# Altium PCB 48-17V Buck Converter.PcbDoc
Units mil, origin at the board's own origin, x right, y up, seen from the top; angles counter-clockwise.
Board outline 2755.91 x 1771.65 mil, 4 copper layers (TOP, GNG, GND, BOT), stack 64.961 mil thick; 43 components, 13 nets, 79 pads, 45 vias.
Unrouted connection lines stored in the file: 2.
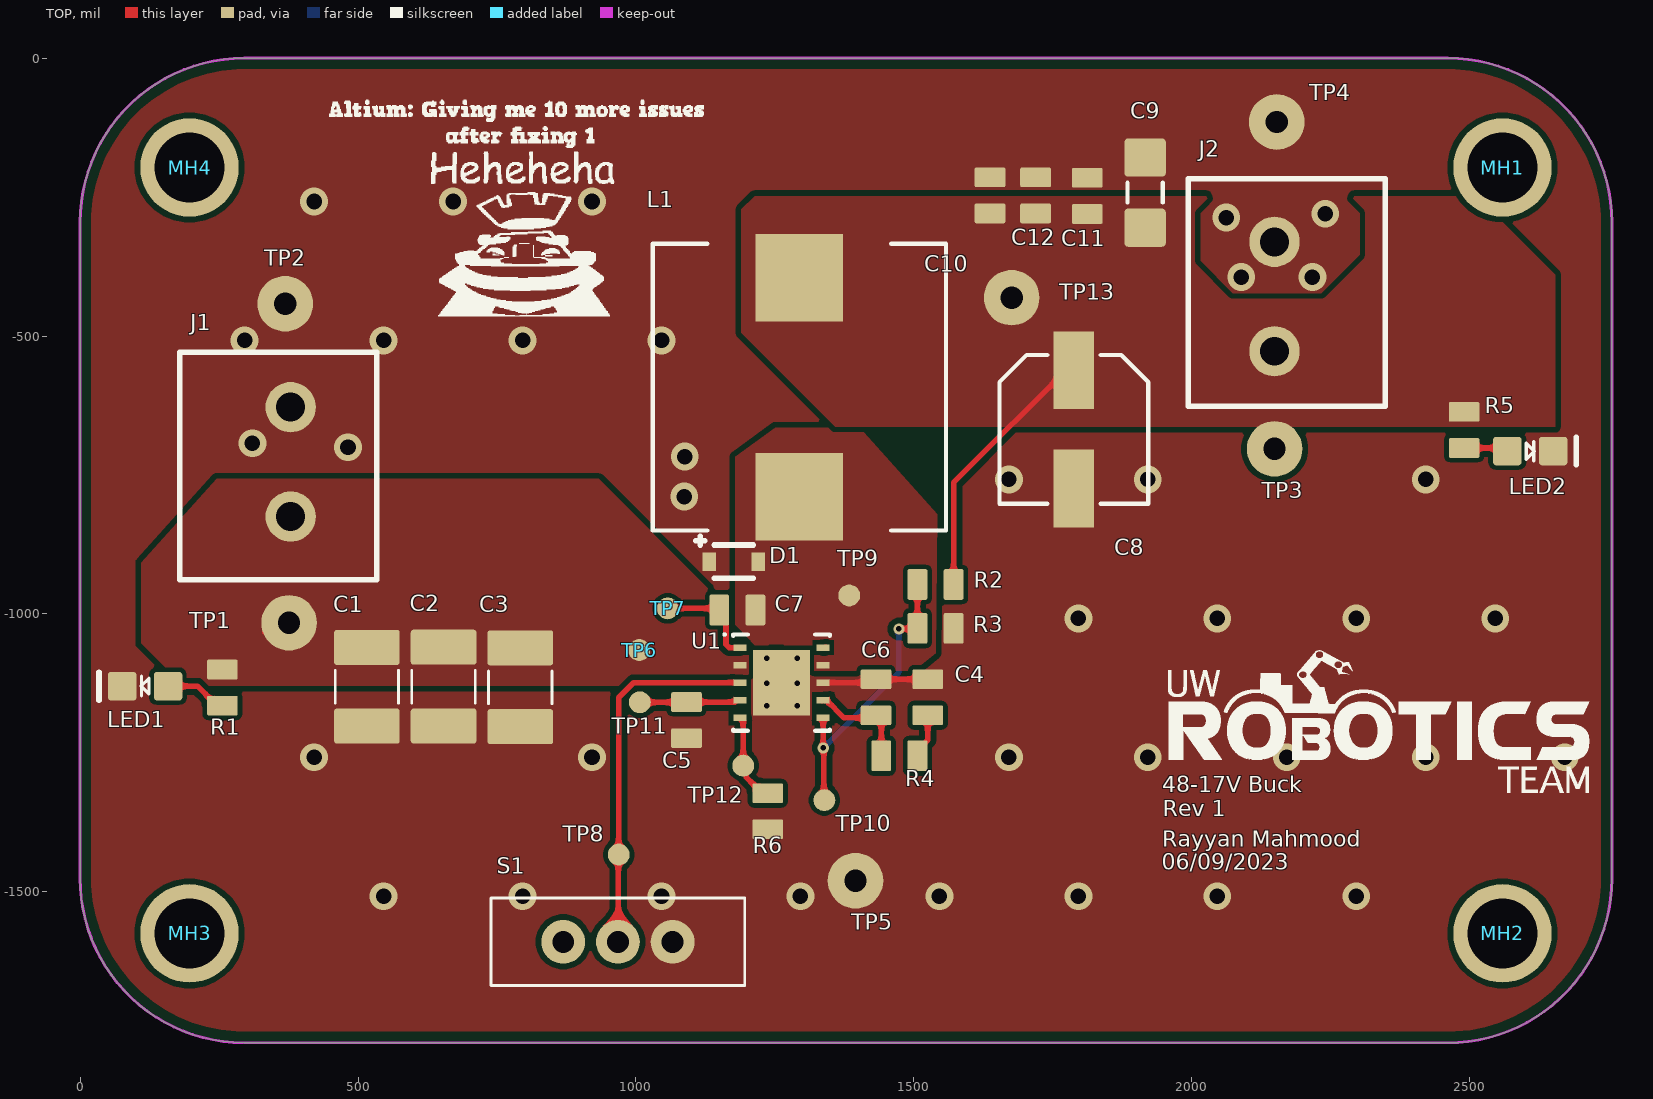
[diagram p0: TOP view]
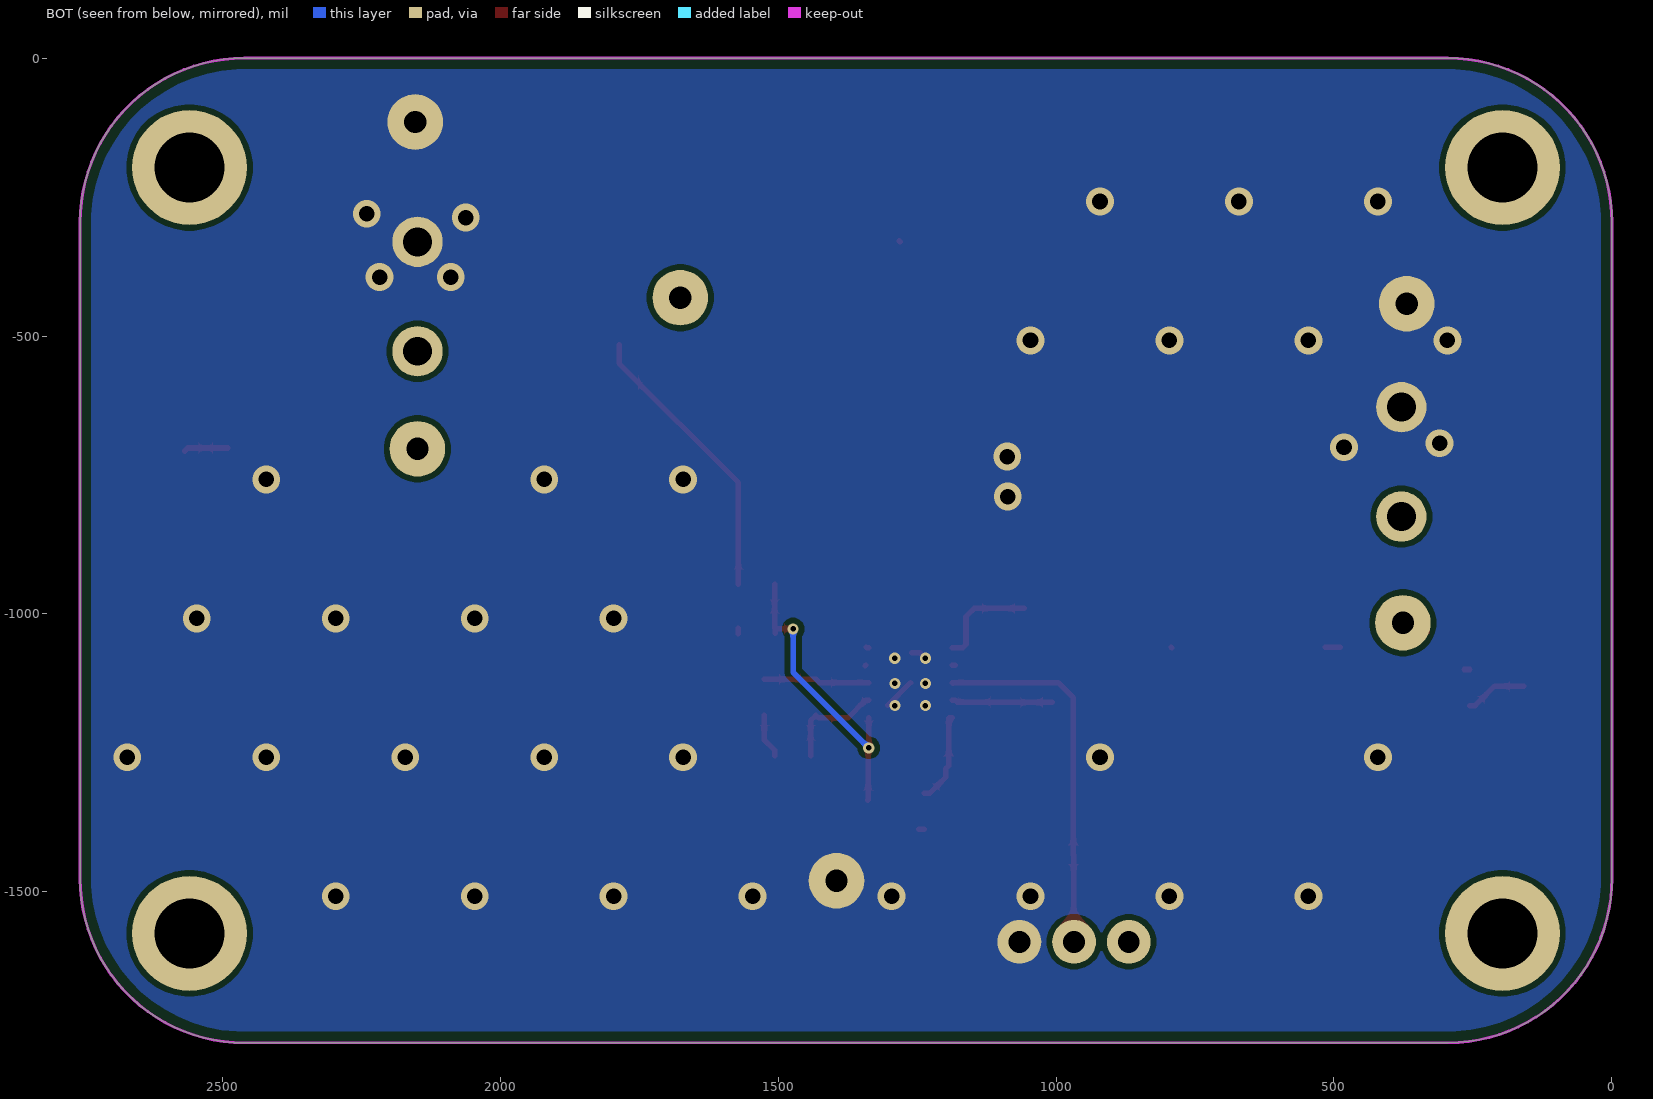
[diagram p1: BOT view, seen from below]
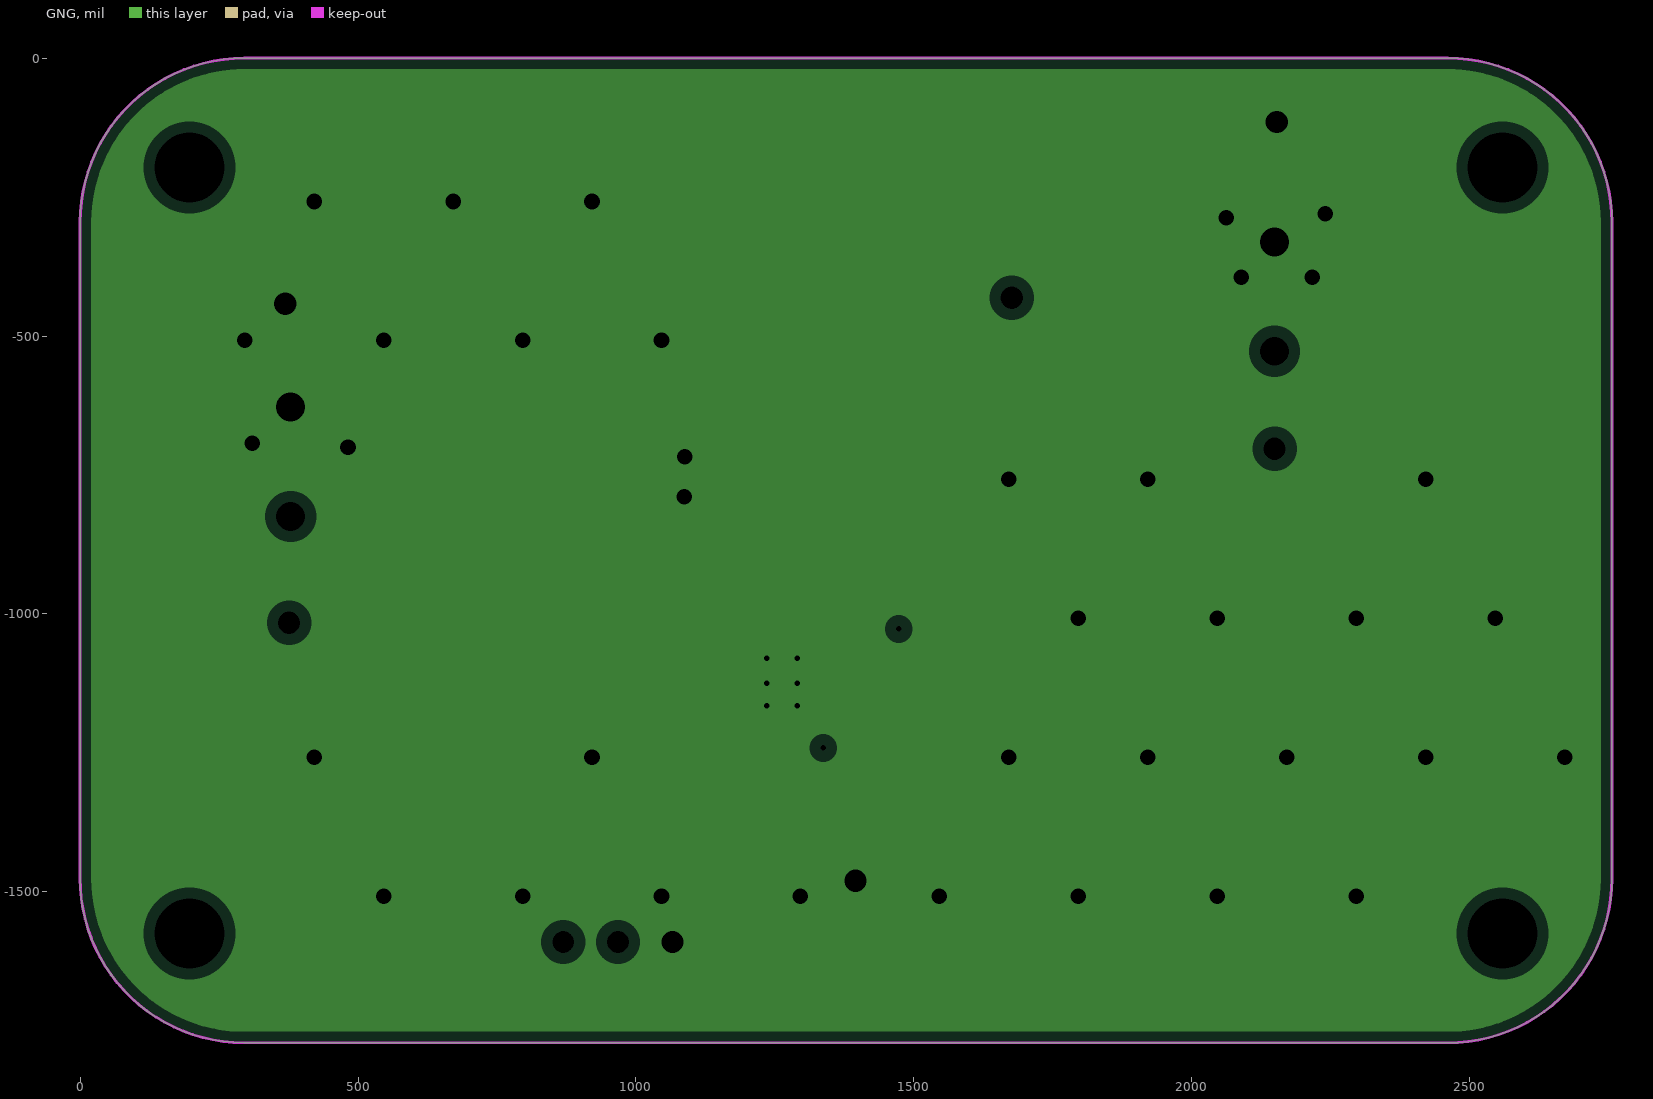
[diagram p2: GNG, clearances drawn from the general rule]
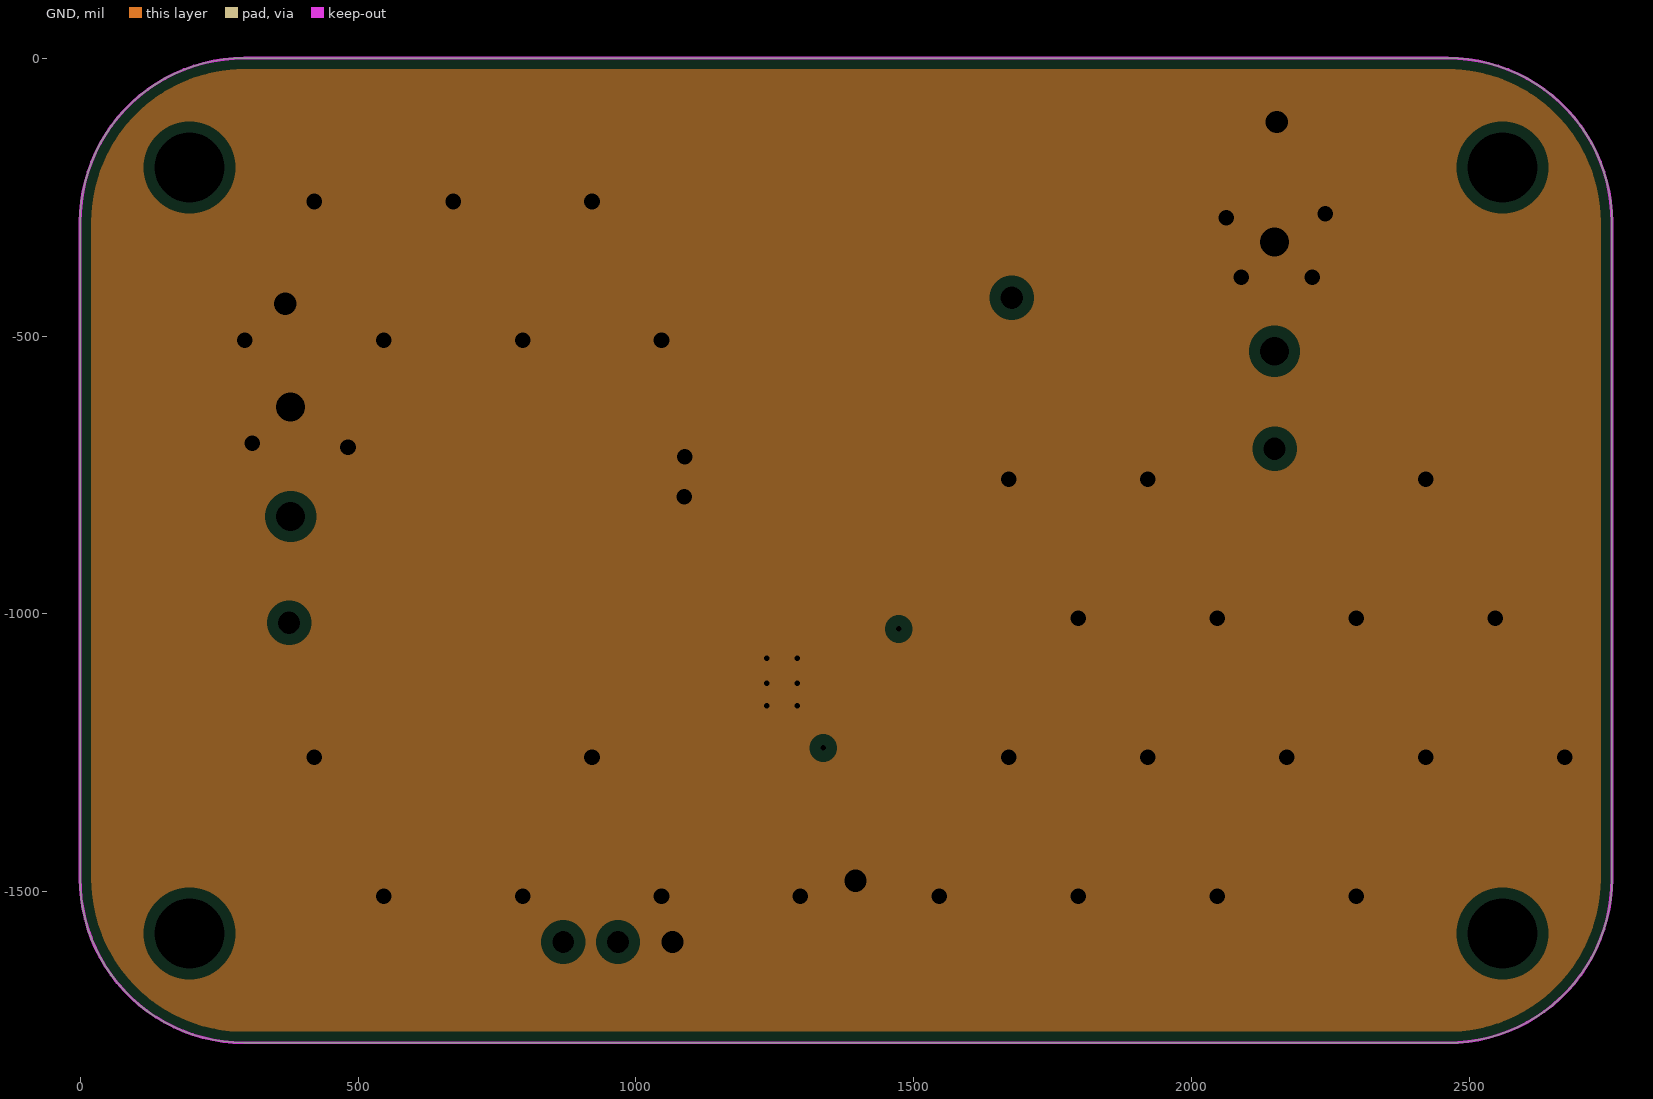
[diagram p3: GND, clearances drawn from the general rule]
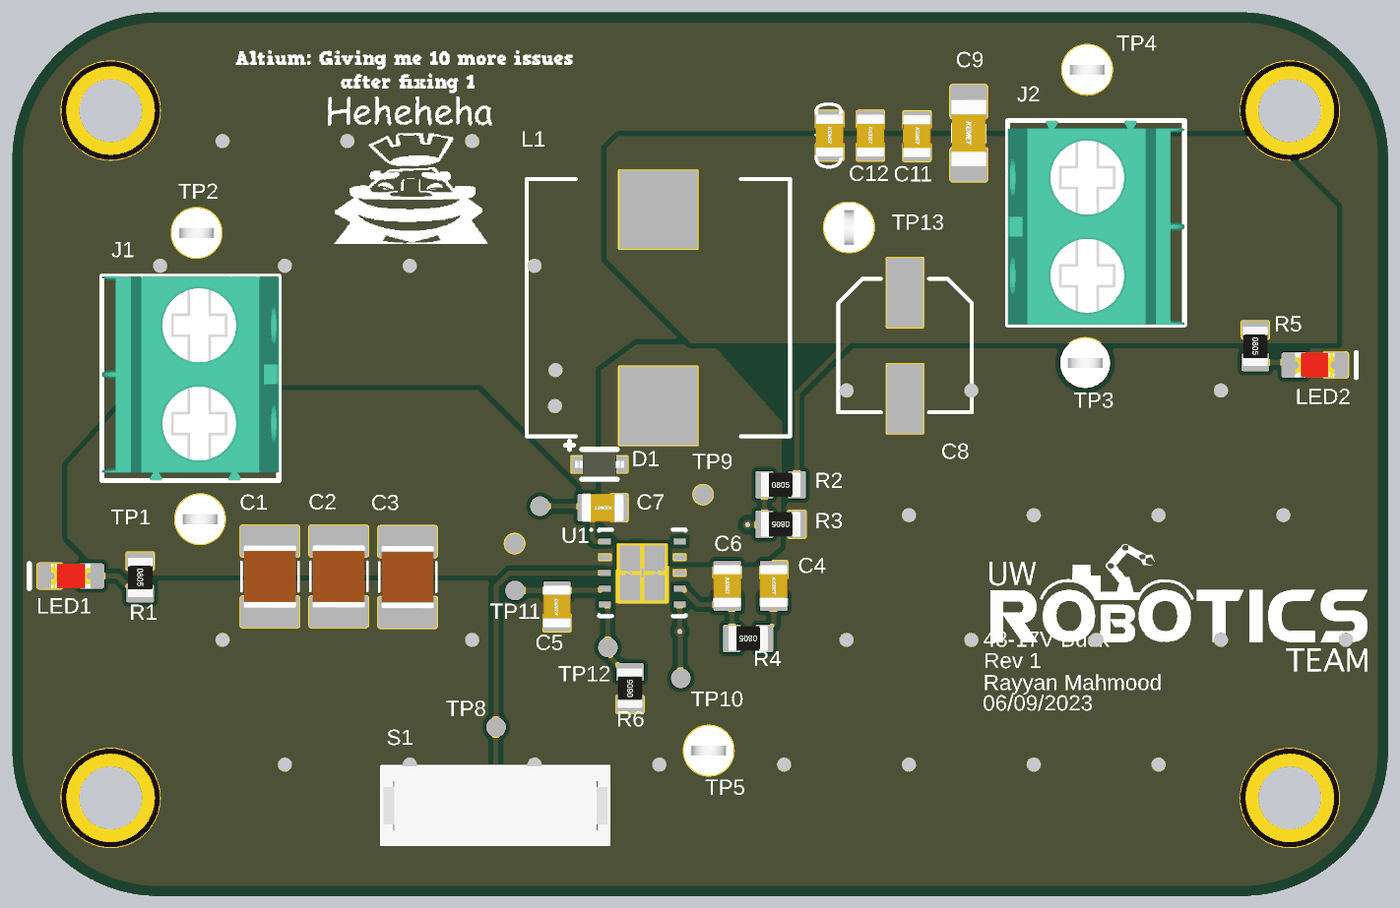
[diagram p4: 3D render of the assembled board from above, using the file's embedded part models]

## Layer stack, top to bottom
Top Solder: solder mask 0.5, Solder Resist, Dk 3.8
TOP: signal copper 2.953
Dielectric 1: prepreg 7.874, 7628, Dk 4.6
GNG: plane copper 0.689, net GND
Core: core 41.929, FR-4, Dk 4.5
GND: plane copper 0.689, net GND
Dielectric 2: prepreg 7.874, 7628, Dk 4.6
BOT: signal copper 2.953
Bottom Solder: solder mask 0.5, Solder Resist, Dk 3.8

## Board outline
0,-1475.54 ccw(c295.28,-1476.38) 294.02,-1771.65 2460.63,-1771.65 ccw(c2460.63,-1476.38) 2755.91,-1476.38 2755.91,-295.28 ccw(c2460.63,-295.28) 2460.63,0 295.28,0 ccw(c295.28,-295.28) 0,-295.28

## Design rules (kind name [scope] priority, off if disabled: settings)
BoardOutlineClearance [All] p1: gap=20 ignorepadtopadclearanceinfootprint=FALSE except(5: Text-OutlineEdge Text-CavityEdge Text-CutoutEdge Text-SplitBarrior Text-SplitContinuation; 25: Track-OutlineEdge Track-CavityEdge Track-CutoutEdge Track-SplitBarrior Track-SplitContinuation)
Clearance "High Voltage Internal" [InNetClass('High_Voltage_Internal')  and OnLayer('Power')] p1: gap=20 ignorepadtopadclearanceinfootprint=TRUE
Clearance "High Voltage External" [InNetClass('High_Voltage')  and OnLayer('Signal')] p2: gap=12 ignorepadtopadclearanceinfootprint=TRUE
Clearance Clearance_1 [All] p3: gap=10 ignorepadtopadclearanceinfootprint=TRUE except(0: Arc-Text Track-Text Text-Hole; 5: Track-Track SMDPad-SMDPad Text-Text; 7: SMDPad-Region; 8: Arc-Arc Arc-Track Arc-SMDPad Arc-Hole Track-SMDPad Track-Region Track-Hole SMDPad-THPad SMDPad-Fill SMDPad-Poly SMDPad-Text SMDPad-Hole THPad-Hole Via-Hole Fill-Hole Poly-Hole Region-Region Region-Hole; 20: THPad-THPad Via-Via)
ComponentClearance [All] p1: gap=10 collisioncheckmode=3 verticalgap=200 showdistances=FALSE
DiffPairsRouting [All] p1: maxlimit=10 minlimit=8 mostfreqgap=10 toplayer_minwidth=10 toplayer_maxwidth=10 toplayer_prefwidth=10 bottomlayer_minwidth=10 bottomlayer_maxwidth=10 bottomlayer_prefwidth=10 maxuncoupledlength=500
Height [All] p1: minheight=0 maxheight=50000 prefheight=500
HoleSize [All] p1: absolutevalues=TRUE maxlimit=200 minlimit=10 maxpercent=80.000 minpercent=20.000
HoleToHoleClearance [All] p1: gap=20 allowstackedmicrovias=TRUE
MinimumAnnularRing [All] p1: minimumring=5
MinimumSolderMaskSliver [All] p1: minsoldermaskwidth=3
PlaneClearance [All] p1: clearance=20
PlaneConnect PlaneConnect_highpwr [(InNet('24V') OR InNet('VBAT'))] p1: planeconnectstyle=Direct reliefexpansion=20 reliefentries=4 reliefconductorwidth=10 reliefairgap=10
PlaneConnect PlaneConnect_GNDCON [(InNet('GND') AND (InComponent('J1') OR InComponent('J2')))] p2: planeconnectstyle=Direct reliefexpansion=20 reliefentries=4 reliefconductorwidth=10 reliefairgap=10
PlaneConnect [All] p3: pad.planeconnectstyle=Relief pad.reliefexpansion=20 pad.reliefentries=4 pad.reliefconductorwidth=10 pad.reliefairgap=10 via.planeconnectstyle=Direct via.reliefexpansion=20 via.reliefentries=4 via.reliefconductorwidth=10 via.reliefairgap=10
PolygonConnect PolygonConnect_Via [IsVia] p1: connectstyle=Direct reliefconductorwidth=10 reliefentries=4 polygonreliefangle="90 Angle" airgapwidth=10
PolygonConnect [All] p2: connectstyle=Direct reliefconductorwidth=10 reliefentries=4 polygonreliefangle="90 Angle" airgapwidth=10
RoutingVias [All] p1: holewidth=12 width=24 viastyle="Through Hole" minholewidth=6 minwidth=12 maxholewidth=24 maxwidth=50
SilkToSilkClearance [All] p1: silktosilkclearance=2
SilkToSolderMaskClearance [IsPad] p1: minsilkscreentomaskgap=0.5 clearancetoexposedcopper=TRUE
SolderMaskExpansion [All] p1: expansion=2 istentingtop=FALSE
Width Width_1 [All] p1: maxlimit=100 minlimit=5 preferedwidth=10 minimp=50.000000 maximp=50.000000 favimp=50.000000
20 further rules are at their usual default settings.

## Components (designator, comment, footprint, x,y, rotation, side; value= is the part's Value field where it differs from the comment)
C1 "CAP_2.2uF_100V_1210_1" CAPC3225X270N 516,-1131 r90 top value=2.2μF
C2 "CAP_2.2uF_100V_1210_1" CAPC3225X270N 653.92,-1130.78 r90 top value=2.2μF
C3 "CAP_2.2uF_100V_1210_1" CAPC3225X270N 792,-1132 r90 top value=2.2μF
C4 "CAP_680pF_50V_0805" CAP0805 1525,-1150 r270 top value=680pF
C5 "CAP_2.7nF_50V_0805" CAP0805 1091,-1191 r90 top value=2.7nF
C6 "CAP_6.8pF_100V_0805" CAP0805 1432,-1150 r270 top value=6.8pF
C7 "CAP_100nF_50V_0805" CAP0805 1182.52,-993 r180 top value=100nF
C8 "CAP_47uF_25V_ALUM" CAP_47uF_25V_ALUM 1788,-668 r270 top value=47uF
C9 "CAP_NU_1206" CAP1206 1916,-242 r270 top value=NU
C10 "CAP_NU_0805" CAP0805 1637,-247 r270 top value=NU
C11 "CAP_NU_0805" CAP0805 1812,-248 r270 top value=NU
C12 "CAP_NU_0805" CAP0805 1719,-247 r270 top value=NU
D1 "DIO_SCHOTTKY_30V_800mA" SOD-323_UNIDIR 1176,-906 r0 top
J1 "CON_2POS_SCREW_TERM" 1935161 378.87,-726.4 r270 top
J2 "CON_2POS_SCREW_TERM" 1935161 2148.91,-429 r90 top
L1 "IND_22uH_6.3A" IND_22uH_6.3A 1294,-592 r90 top
LED1 "LED_RED" LED_0805_RED 117,-1130 r180 top
LED2 "LED_RED" LED_0805_RED 2609,-707 r0 top
MH1 "MOUNTING_HOLE_M3_GIMBAL_REV2" MOUNTING_HOLE_3mm_GIMBAL_REV2#1 2524.48,-165.52 r0 top
MH2 "MOUNTING_HOLE_M3_GIMBAL_REV2" MOUNTING_HOLE_3mm_GIMBAL_REV2#2 2579.91,-1561.65 r0 top
MH3 "MOUNTING_HOLE_M3_GIMBAL_REV2" MOUNTING_HOLE_3mm_GIMBAL_REV2#3 259.52,-1529.49 r0 top
MH4 "MOUNTING_HOLE_M3_GIMBAL_REV2" MOUNTING_HOLE_3mm_GIMBAL_REV2#4 137.8,-149.65 r0 top
R1 "RES_4.7kΩ_0805_5%" RES0805 256,-1132.52 r270 top value=4.7kΩ
R2 "RES_243kΩ_0805_1%_1" RES0805 1539,-947 r0 top value=243kΩ
R3 "RES_12kΩ_0805_1%" RES0805 1539,-1026 r180 top value=12kΩ
R4 "RES_68.1kΩ_0805_1%" RES0805 1474,-1255 r180 top value=68.1kΩ
R5 "RES_1.6kΩ_0805_0.1%" RES0805 2490,-669 r270 top value=1.6kΩ
R6 "RES_205kΩ_0805_1%" RES0805 1237,-1355 r90 top value=205kΩ
S1 "SW_SLIDE_TOGGLE" SW_SLIDE_TOGGLE 967.57,-1590 r180 top
TP1 "TESTPOINT_LOOP" TESTPOINT_LOOP 376,-1016 r0 top
TP2 "TESTPOINT_LOOP" TESTPOINT_LOOP 369,-442 r0 top
TP3 "TESTPOINT_LOOP" TESTPOINT_LOOP 2149,-703 r0 top
TP4 "TESTPOINT_LOOP" TESTPOINT_LOOP 2153,-115 r0 top
TP5 "TESTPOINT_LOOP" TESTPOINT_LOOP 1395,-1480 r0 top
TP6 "TESTPOINT_1MM_CIRCLE" TESTPOINT_CIRCLE_1MM 1006,-1065 r90 top
TP7 "TESTPOINT_1MM_CIRCLE" TESTPOINT_CIRCLE_1MM 1057,-990 r90 top
TP8 "TESTPOINT_1MM_CIRCLE" TESTPOINT_CIRCLE_1MM 969.01,-1433 r90 top
TP9 "TESTPOINT_1MM_CIRCLE" TESTPOINT_CIRCLE_1MM 1383.71,-966.72 r90 top
TP10 "TESTPOINT_1MM_CIRCLE" TESTPOINT_CIRCLE_1MM 1339,-1335 r90 top
TP11 "TESTPOINT_1MM_CIRCLE" TESTPOINT_CIRCLE_1MM 1007,-1159 r90 top
TP12 "TESTPOINT_1MM_CIRCLE" TESTPOINT_CIRCLE_1MM 1193,-1273 r90 top
TP13 "TESTPOINT_LOOP" TESTPOINT_LOOP 1676,-431 r90 top
U1 "TPS54561" BUCK_TPS54561DPRR 1261.91,-1123.65 r0 top

## Footprints (in the part's own frame and the unit in brackets; to place one, negate y for a bottom-side part, rotate by r counter-clockwise, add the part's x,y. Pads: shape width x height; smd on the part's side, far side on the other; paste and mask are expansions set on the pad)
1935161 [mm] "TERM BLK 2POS SIDE ENTRY 5MM PCB"
  round 2.3 hole 1.325: 1(-2.5,0) 2(2.5,0)
  silkscreen extent -5.01,-5.06 5.39,3.94, body extent -5.01,-5.06 5.39,3.94, height 11.41
BUCK_TPS54561DPRR [mm] "Buck Switching Regulator IC Positive Adjustable 0.8V 1 Output 5A 10-WDFN Exposed Pad"
  rect 0.6x0.3 smd: 1(-1.9,1.6) 2(-1.9,0.8) 3(-1.9,0) 4(-1.9,-0.8) 5(-1.9,-1.6) 6(1.9,-1.6) 7(1.9,-0.8) 8(1.9,0) 9(1.9,0.8)
  rect 0.6x0.3 smd mask+0.051: 10(1.9,1.6)
  rect 2.6x3 smd paste-1.245: 11(0,0)
  silkscreen extent -2.65,-2.2 2.2,2.25, body extent -2.05,-2.05 2.05,2.05, height 0.8
CAP0805 [mm] "Chip Capacitor, Body 2.0x1.2mm, Height 0.45mm, IPC Medium Density"
  rrect15% 0.9x1.4 smd: 1(-0.825,0) 2(0.825,0)
  body extent -1.1,-0.73 1.1,0.73, height 1.39
CAP1206 [mm] "Chip Capacitor, Body 3.2x1.6mm, Height 0.55mm, IPC Medium Density"
  rrect20% 1.75x1.9 smd: 1(-1.6,0) 2(1.6,0)
  silkscreen extent -0.45,-0.8 0.45,0.8, body extent -1.7,-0.9 1.7,0.9, height 0.88
CAP_47uF_25V_ALUM [mm] "Aluminum Electrolytic Capacitor, Body 6.60x6.60x6.00mm, IPC Low Density"
  rect 3.55x1.85 smd: 1(-2.7,0) 2(2.7,0)
  silkscreen extent -3.4,-3.4 3.4,3.4, body extent -3.4,-3.4 3.4,3.4, height 6
CAPC3225X270N [mm]
  rrect15% 1.6x3 smd: 1(-1.8,0) 2(1.8,0)
  silkscreen extent -0.75,-1.45 0.75,1.45, body extent -1.6,-1.35 1.6,1.35, height 2.55
IND_22uH_6.3A [mm] "Precision Wire Wound Inductor, 2-Leads, Body 13.10x13.40mm, IPC Medium Density"
  rect 4x4 smd: 1(-5,0) 2(5,0)
  silkscreen extent -6.55,-6.7 6.55,6.7, body extent -6.55,-6.7 6.55,6.7, height 3.7
LED_0805_RED [mm] "SMD, 2-Leads, Body 2x1.25mm"
  rrect20% 1.3x1.3 smd: 1(-1.05,0) 2(1.05,0)
  silkscreen extent -0.18,-0.63 2.11,0.64, body extent -1,-0.62 1,0.63, height 1.12
MOUNTING_HOLE_3mm_GIMBAL_REV2#1 [mm] "3mm Hole"
  round 4.5 / inner round 4.5 / far side round 5.25 hole 3.2 mask+0.3: 0(0.878,-0.796)
MOUNTING_HOLE_3mm_GIMBAL_REV2#2 [mm] "3mm Hole"
  round 4.5 / inner round 4.5 / far side round 5.25 hole 3.2 mask+0.3: 0(-0.53,-0.334)
MOUNTING_HOLE_3mm_GIMBAL_REV2#3 [mm] "3mm Hole"
  round 4.5 / inner round 4.5 / far side round 5.25 hole 3.2 mask+0.3: 0(-1.592,-1.151)
MOUNTING_HOLE_3mm_GIMBAL_REV2#4 [mm] "3mm Hole"
  round 4.5 / inner round 4.5 / far side round 5.25 hole 3.2 mask+0.3: 0(1.5,-1.199)
RES0805 [mm] "Chip Resistor, 2-Leads, Body 2.00x1.25mm, IPC High Density"
  rrect15% 0.9x1.4 smd: 1(-0.825,0) 2(0.825,0)
  body extent -1,-0.62 1,0.63, height 0.61
SOD-323_UNIDIR [mm]
  rect 0.63x0.83 smd: 1(-1.115,0) 2(1.115,0)
  silkscreen extent -1.73,-0.76 0.9,1.17, body extent -1.24,-0.62 1.24,0.62, height 1.1
SW_SLIDE_TOGGLE [mm]
  round 2 hole 1: 1(-2.5,0) 2(0,0) 3(2.5,0)
  silkscreen extent -5.8,-2 5.8,2, body extent -5.8,-2 5.8,2, height 7
TESTPOINT_CIRCLE_1MM [mm]
  round 1 smd: 1(0,0)
TESTPOINT_LOOP [mm]
  round 2.54 hole 1.02: 1(0,0)
  body extent -1.27,-1.27 1.27,1.27, height 4.57

## Part data
C1 C2 C3: "CAP CER 2.2UF 100V X7R 1210", Manufacturer 1="TDK Corporation", Manufacturer Part Number 1=C3225X7R2A225K230AB, Package/Footprint=1210, Supplier Part Number 1=445-4497-1-ND, Voltage Rating=100V, Mounting Type=SMD, Supplier 1=Digi-Key
C4: "CAP CER 680PF 100V C0G/NP0 0805", Manufacturer 1="KYOCERA AVX", Manufacturer Part Number 1=08051A681JAT2A, Package/Footprint=0805, Supplier Part Number 1=478-1289-1-ND, Voltage Rating=100V, Supplier 1=Digi-Key
C5: "CAP CER 2700PF 50V C0G 0805", Manufacturer 1="TDK Corporation", Manufacturer Part Number 1=C2012C0G1H272J060AA, Package/Footprint=0805, Supplier Part Number 1=445-7508-1-ND, Voltage Rating=50V, Supplier 1=Digi-Key
C6: "CAP CER 6.8PF 100V C0G/NP0 0805", Manufacturer 1="KYOCERA AVX", Manufacturer Part Number 1=08051A6R8CAT2A, Package/Footprint=0805, Supplier Part Number 1=478-5025-1-ND, Voltage Rating=100V, Supplier 1=Digi-Key
C7: "CAP CER 0.1UF 50V X7R 0805", Manufacturer 1="Samsung Electro-Mechanics", Manufacturer Part Number 1=CL21B104KBCNNNC, Package/Footprint=0805, Supplier Part Number 1=1276-1003-1-ND, Voltage Rating=50V, Supplier 1=Digi-Key
C8: "CAP ALUM POLY 47UF 20% 25V SMD", Manufacturer 1="Panasonic Electronic Components", Manufacturer Part Number 1=25SVPF47M, Supplier Part Number 1=P16513CT-ND, Voltage=25V, Mounting Type=SMD, Supplier 1=DigiKey
C9: "PLACEHOLDER CAPACITOR", Package=1206, Mounting Type="Surface Mount"
C10 C11 C12: "PLACEHOLDER CAPACITOR", Package=0805, Mounting Type=SMD
D1: library part DIO_SCHOTTKY_60V_5A, "DIODE SCHOTTKY 60V 5A SMC", Manufacturer 1="Diodes Incorporated", Manufacturer Part Number 1=B560C-13-F, Supplier Part Number 1=B560C-FDICT-ND, Io=5A, Mounting Type=SMD, Supplier 1=Digi-Key, Vf (Max)=700mV, Vr (Max)=60V
J1 J2: "TERM BLK 2POS SIDE ENTRY 5MM", Manufacturer 1="Phoenix Contact", Manufacturer Part Number 1=1935161, Package/Footprint=SMD, Supplier Part Number 1=277-1667-ND, Mounting Type=TH, Supplier 1=Digi-Key
L1: "FIXED IND 22UH 6.3A 25.7MOHM SMD", Current Rating=6.3A, DC Resistance (DCR)=22.27mR, Inductance=22μH, Inductance Tolerance=20%, Manufacturer 1="Eaton - Electronics Division", Manufacturer Part Number 1=HC9-220-R, Saturation Current=11A, Supplier Part Number 1=513-1349-1-ND, Mounting Type=SMD, Supplier 1=Digi-Key
LED1 LED2: "LED RED DIFFUSED 0805 SMD", Forward Voltage Drop=2V, Manufacturer 1=OSRAM, Manufacturer Part Number 1="LS R976-NR-1", Package/Footprint=0805, Supplier Part Number 1=475-1278-1-ND, Mounting Type=SMD, Supplier 1=Digi-Key
MH1 MH2 MH3 MH4: "MOUNTING_HOLE_M3 Gimbal Rev2"
R1: "RES 4.7K OHM 5% 1/8W 0805", LCSC Part #=C17673, Manufacturer 1=Yageo, Manufacturer Part Number 1=RC0805JR-074K7L, Package=0805, Supplier Part Number 1=311-4.7KARCT-ND, Mounting Type=SMD, Supplier 1=Digi-Key
R2: "RES 243K OHM 1% 1/8W 0805", Manufacturer 1=YAGEO, Manufacturer Part Number 1=RC0805FR-07243KL, Package/Footprint=0805, Supplier Part Number 1=311-243KCRCT-ND, Mounting Type=SMD, Supplier 1=Digi-Key
R3: "RES 12K OHM 1% 1/8W 0805", Manufacturer 1=YAGEO, Manufacturer Part Number 1=RC0805FR-0712KL, Package/Footprint=0805, Supplier Part Number 1=311-12.0KCRCT-ND, Mounting Type=SMD, Supplier 1=Digi-Key
R4: "RES 68.1K OHM 1% 1/8W 0805", Manufacturer 1=YAGEO, Manufacturer Part Number 1=RC0805FR-0768K1L, Package/Footprint=0805, Supplier Part Number 1=311-68.1KCRCT-ND, Mounting Type=SMD, Supplier 1=Digi-Key
R5: "RES 1.6K OHM 0.1% 1/4W 0805", Manufacturer 1=Panasonic, Manufacturer Part Number 1=ERJ-PB6B1601V, Supplier Part Number 1=P20615CT-ND, Tolerance=0.1%, Mounting Type=SMD, Supplier 1=Digi-Key
R6: "RES 205K OHM 1% 1/8W 0805", Manufacturer 1=YAGEO, Manufacturer Part Number 1=RC0805FR-07205KL, Package/Footprint=0805, Supplier Part Number 1=311-205KCRCT-ND, Mounting Type=SMD, Supplier 1=Digi-Key
S1: "SWITCH SLIDE SPDT 200MA 30V", Manufacturer 1=E-Switch, Manufacturer Part Number 1=100SP1T1B4M2QE, Package/Footprint=TH, Supplier Part Number 1=EG1903-ND, Voltage Rating (DC)=30V, Mounting Type=TH, Supplier 1=Digi-Key, Throw Configuration=SPDT
TP1 TP2 TP3 TP4 TP5 TP13: "TESTPOINT THRUHOLE", Manufacturer 1="Keystone Electronics", Manufacturer Part Number 1=5002, Package/Footprint=TH, Supplier Part Number 1=36-5002-ND, Mounting Type=TH, Supplier 1=Digi-Key
TP6 TP7 TP8 TP9 TP10 TP11 TP12: "TESTPOINT 1MM CIRCLE"
U1: "Buck Switching Regulator IC Positive Adjustable 0.8V 1 Output 5A 10-WDFN Exposed Pad", Manufacturer 1="Texas Instruments", Manufacturer Part Number 1=TPS54561DPRR, Package/Footprint="10-WDFN Exposed Pad", Supplier Part Number 1=296-40803-1-ND, Mounting Type=SMD, Supplier 1=Digi-Key

## Via types
v1: diameter 50, hole 28, TOP to BOT, tented both sides, 37 vias
v2: diameter 20, hole 10, TOP to BOT, tented both sides, 8 vias

## Nets (pads, with @x,y where several pads share a name; then routed paths per layer and width w, separated by ;. In a path a pad name is that pad's centre, name@x,y a point inside that pad or via, vN(x,y) a via of type N, cw(c..) or ccw(c..) an arc to the next point about the centre after c; other vN are vias at no path point)
17V: C8.1 C9.2 C10.2 C11.2 C12.2 J2.1 L1.2 R2.2 R5.1 TP3.1 TP13.1 | length 521.8
  TOP w10: L1.2@1280.83,-330.04 L1.2@1281.91,-328.97 ; R2.2 1571.48,-763.73 1786.11,-549.1 C8.1@1786.11,-515.64
GND: C1.1 C2.1 C3.1 C4.1 C5.1 C6.1 C8.2 C9.1 C10.1 C11.1 C12.1 D1.1 J1.1 J2.2 LED1.2 LED2.2 R3.1 R6.1 S1.1 TP2.1 TP4.1 TP5.1 U1.8 U1.11 | length 325.5
  TOP w10: v2(1235.25,-1079.75) 1245.23,-1069.77 U1.11@1259.84,-1069.77 ; R6.1 R6.1@1246.84,-1387.48 ; U1.11 U1.11@1302.59,-1164.33 ; U1.8 1425.87,-1123.65 C6.1 C4.1 ; R3.1@1571.48,-1035.84 R3.1 ; J2.2 J2.2@2150.91,-328.57 ; TP4.1 TP4.1@2168.05,-99.95 ; J2.2@2159.91,-330.22 J2.2@2163.19,-326.93
  other v1: 546,-1508 796,-1508 1046,-1508 1296,-1508 1546,-1508 1796,-1508 2046,-1508 2296,-1508 421,-1258 921,-1258 1671,-1258 1921,-1258 2171,-1258 2421,-1258 2671,-1258 1796,-1008 2046,-1008 2296,-1008 2546,-1008 1087,-789 1671,-758 1921,-758 2421,-758 1088,-717 482,-700 310,-693 296,-508 546,-508 796,-508 1046,-508 2089,-394 2217,-394 2062,-287 2240,-280 421,-258 671,-258 921,-258
  other v2: 1235,-1165 1290,-1165 1235,-1125 1290,-1125 1290.25,-1079.75
NetC4_2: C4.2 R4.1 | length 80.2
  TOP w10: R4.1 1506.48,-1245.16 1525,-1226.64 C4.2
NetC5_2: C5.2 TP11.1 U1.4 | length 181.7
  TOP w10: TP11.1 1090.52,-1159 C5.2 1177.82,-1158.52 1181.2,-1155.14 U1.4
NetC6_2: C6.2 R4.2 U1.7 | length 187.8
  TOP w10: U1.7 1342.61,-1155.14 1374.47,-1187 1427.48,-1187 C6.2 1441.52,-1192 R4.2 ; U1.7@1342.57,-1155.32 U1.7@1343.3,-1156.05
NetC7_1: C7.1 D1.2 L1.1 TP9.1 U1.9 | length 1.5
  TOP w10: U1.9@1342.57,-1092.33 1342.8,-1092.33 1343.52,-1093.06 U1.9@1343.52,-1093.28
NetC7_2: C7.2 TP7.1 U1.1 | length 188.6
  TOP w10: TP7.1 1147.04,-990 C7.2 1162.01,-1004.97 1162.01,-1054.8 1167.87,-1060.65 U1.1
NetLED1_1: LED1.1 R1.2 | length 112.2
  TOP w10: LED1.1 211.16,-1130 246.16,-1165 R1.2
NetLED2_1: LED2.1 R5.2 | length 79.9
  TOP w10: R5.2 2490.05,-701.53 2562.19,-701.53 LED2.1
NetR2_1: R2.1 R3.2 TP10.1 U1.6 | length 540.4
  TOP w10: U1.6 1336.85,-1186.78 1336.85,-1240.85 v2(1337,-1241) 1338,-1242 1338,-1334 TP10.1 ; v2(1473,-1027) R3.2@1505.52,-1027 ; R3.2@1505.52,-1034.84 R3.2@1505.52,-1027 ; R2.1 R3.2 R3.2@1505.52,-1027
  BOT w10: v2(1337,-1241) 1473,-1105 v2(1473,-1027)
NetR6_2: R6.2 TP12.1 U1.5 | length 165.2
  TOP w10: U1.5 1192.09,-1186.64 1193,-1187.54 TP12.1 1198.62,-1278.62 1198.62,-1293.98 1227.16,-1322.52 R6.2
NetS1_2: S1.2 TP8.1 U1.3 | length 669.9
  TOP w10: S1.2 968.29,-1589.29 968.29,-1433.71 TP8.1 969,-1150.78 996.13,-1123.65 1185.29,-1123.65 1186.2,-1124.55 U1.3
VBAT: C1.2 C2.2 C3.2 J1.2 R1.1 TP1.1 TP6.1 U1.2 | length 105.2
  TOP w10: R1.1 R1.1@265.84,-1100.04 ; TP1.1@332.66,-1033.22 358.78,-1033.22 TP1.1 TP1.1@377.43,-1014.57 ; J1.2@377.43,-826.26 J1.2 ; C1.2@488.44,-1060.13 C1.2 ; C3.2 C3.2@793,-1060.13 ; U1.2@1181.16,-1092.33 U1.2@1187.06,-1092.33 ; U1.2@1181.2,-1092.15 U1.2
pads on no net: MH1.0 MH2.0 MH3.0 MH4.0 S1.3 U1.10
copper on no net: | length 5
  TOP w10: 1336.71,-1060.65 1340.45,-1060.65 1341.35,-1059.75

## Polygon pours and split planes (outlines as drawn)
NetC7_1 on TOP "NETC7_1_L01_P010" (solid, remove dead copper, pour order 10): 1179,-717.43 1250.74,-665 1402,-665 1542,-821 1539,-1071.14 1500.88,-1102 1255.91,-1102 1179,-1019.1
GND on TOP "GND_L01_P012" (solid, remove dead copper, pour order 12): -364.46,84.17 2970.87,84.17 2970.87,-2065.83 -379.13,-2065.83
VBAT on TOP "VBAT_L01_P008" (solid, remove dead copper, pour order 8): 110,-907.69 110,-1053 186,-1129 1182,-1129 1210.4,-1100.6 1210.4,-1034.4 933,-757 245.74,-757
17V on TOP "17V_L01_P009" (solid, remove dead copper, pour order 9): 1189.7,-272.36 1213.94,-248.12 2512.46,-248.12 2653.7,-389.36 2653.7,-663.36 1358.7,-663.36 1189.7,-494.36
GND on TOP "GND_L01_P007" (solid, pour order 7): 2016,-279 2016,-365 2074,-423 2233,-423 2302,-354 2302,-279 2270,-247 2048,-247
GND on BOT "GND_L04_P011" (solid, remove dead copper, pour order 11): 0,-1475.54 ccw(c295.28,-1476.38) 294.02,-1771.65 2460.63,-1771.65 ccw(c2460.63,-1476.38) 2755.91,-1476.38 2755.91,-295.28 ccw(c2460.63,-295.28) 2460.63,0 295.28,0 ccw(c295.28,-295.28) 0,-295.28
GND on GND (split plane): 295.28,-20.1 2460.63,-20.1 2461.36,-20.02 2475.04,-20.38 2489.4,-21.51 2503.69,-23.39 2517.86,-26.02 2531.87,-29.39 2545.69,-33.48 2559.28,-38.29 2572.59,-43.8 2585.6,-50.01 2598.26,-56.89 2610.55,-64.41 2622.43,-72.58 2633.86,-81.35 2644.82,-90.71 2655.27,-100.63 2665.2,-111.08 2674.55,-122.04 2683.33,-133.48 2691.49,-145.35 2699.02,-157.64 2705.9,-170.31 2712.1,-183.31 2717.62,-196.63 2722.43,-210.21 2726.52,-224.03 2729.88,-238.04 2732.51,-252.21 2734.39,-266.5 2735.52,-280.87 2735.88,-294.55 2735.81,-295.28 2735.81,-1476.38 2735.88,-1477.11 2735.52,-1490.78 2734.39,-1505.15 2732.51,-1519.44 2729.88,-1533.61 2726.52,-1547.62 2722.43,-1561.44 2717.62,-1575.02 2712.1,-1588.34 2705.9,-1601.35 2699.02,-1614.01 2691.49,-1626.3 2683.33,-1638.17 2674.55,-1649.61 2665.2,-1660.57 2655.28,-1671.02 2644.82,-1680.94 2633.86,-1690.3 2622.43,-1699.07 2610.55,-1707.24 2598.26,-1714.77 2585.6,-1721.64 2572.59,-1727.85 2559.28,-1733.36 2545.69,-1738.17 2531.88,-1742.27 2517.86,-1745.63 2503.69,-1748.26 2489.4,-1750.14 2475.04,-1751.27 2461.36,-1751.63 2460.63,-1751.55 294.02,-1751.55 293.53,-1751.6 280.87,-1751.27 266.5,-1750.14 252.21,-1748.26 238.04,-1745.63 224.03,-1742.27 210.21,-1738.18 196.63,-1733.36 183.31,-1727.85 170.31,-1721.65 157.64,-1714.77 145.35,-1707.24 133.48,-1699.08 122.04,-1690.3 111.08,-1680.94 100.63,-1671.02 90.71,-1660.57 81.35,-1649.61 72.58,-1638.18 64.41,-1626.3 56.88,-1614.01 50.01,-1601.35 43.8,-1588.34 38.29,-1575.03 33.48,-1561.44 29.39,-1547.62 26.02,-1533.61 23.39,-1519.44 21.51,-1505.15 20.38,-1490.78 20.01,-1476.46 20.1,-1475.54 20.1,-295.28 20.02,-294.55 20.38,-280.87 21.51,-266.5 23.39,-252.21 26.02,-238.04 29.39,-224.03 33.48,-210.21 38.29,-196.63 43.8,-183.31 50.01,-170.31 56.89,-157.64 64.41,-145.35 72.58,-133.48 81.35,-122.04 90.71,-111.08 100.63,-100.63 111.08,-90.71 122.04,-81.35 133.48,-72.58 145.35,-64.41 157.64,-56.89 170.31,-50.01 183.31,-43.8 196.63,-38.29 210.21,-33.48 224.03,-29.39 238.04,-26.02 252.21,-23.39 266.5,-21.51 280.87,-20.38 294.55,-20.02
GND on GNG (split plane): 295.28,-20.1 2460.63,-20.1 2461.36,-20.02 2475.04,-20.38 2489.4,-21.51 2503.69,-23.39 2517.86,-26.02 2531.87,-29.39 2545.69,-33.48 2559.28,-38.29 2572.59,-43.8 2585.6,-50.01 2598.26,-56.89 2610.55,-64.41 2622.43,-72.58 2633.86,-81.35 2644.82,-90.71 2655.27,-100.63 2665.2,-111.08 2674.55,-122.04 2683.33,-133.48 2691.49,-145.35 2699.02,-157.64 2705.9,-170.31 2712.1,-183.31 2717.62,-196.63 2722.43,-210.21 2726.52,-224.03 2729.88,-238.04 2732.51,-252.21 2734.39,-266.5 2735.52,-280.87 2735.88,-294.55 2735.81,-295.28 2735.81,-1476.38 2735.88,-1477.11 2735.52,-1490.78 2734.39,-1505.15 2732.51,-1519.44 2729.88,-1533.61 2726.52,-1547.62 2722.43,-1561.44 2717.62,-1575.02 2712.1,-1588.34 2705.9,-1601.35 2699.02,-1614.01 2691.49,-1626.3 2683.33,-1638.17 2674.55,-1649.61 2665.2,-1660.57 2655.28,-1671.02 2644.82,-1680.94 2633.86,-1690.3 2622.43,-1699.07 2610.55,-1707.24 2598.26,-1714.77 2585.6,-1721.64 2572.59,-1727.85 2559.28,-1733.36 2545.69,-1738.17 2531.88,-1742.27 2517.86,-1745.63 2503.69,-1748.26 2489.4,-1750.14 2475.04,-1751.27 2461.36,-1751.63 2460.63,-1751.55 294.02,-1751.55 293.53,-1751.6 280.87,-1751.27 266.5,-1750.14 252.21,-1748.26 238.04,-1745.63 224.03,-1742.27 210.21,-1738.18 196.63,-1733.36 183.31,-1727.85 170.31,-1721.65 157.64,-1714.77 145.35,-1707.24 133.48,-1699.08 122.04,-1690.3 111.08,-1680.94 100.63,-1671.02 90.71,-1660.57 81.35,-1649.61 72.58,-1638.18 64.41,-1626.3 56.88,-1614.01 50.01,-1601.35 43.8,-1588.34 38.29,-1575.03 33.48,-1561.44 29.39,-1547.62 26.02,-1533.61 23.39,-1519.44 21.51,-1505.15 20.38,-1490.78 20.01,-1476.46 20.1,-1475.54 20.1,-295.28 20.02,-294.55 20.38,-280.87 21.51,-266.5 23.39,-252.21 26.02,-238.04 29.39,-224.03 33.48,-210.21 38.29,-196.63 43.8,-183.31 50.01,-170.31 56.89,-157.64 64.41,-145.35 72.58,-133.48 81.35,-122.04 90.71,-111.08 100.63,-100.63 111.08,-90.71 122.04,-81.35 133.48,-72.58 145.35,-64.41 157.64,-56.89 170.31,-50.01 183.31,-43.8 196.63,-38.29 210.21,-33.48 224.03,-29.39 238.04,-26.02 252.21,-23.39 266.5,-21.51 280.87,-20.38 294.55,-20.02

## Keep-outs
Keep-Out Layer:
  lines w5: 0,-1476.38 0,-295.28 cw(c295.28,-295.28) 295.28,0 2460.63,0 cw(c2460.63,-295.28) 2755.91,-295.28 2755.91,-1476.38 cw(c2460.63,-1476.38) 2460.63,-1771.65 294.02,-1771.65 cw(c295.28,-1476.38) 0,-1475.54

## Silkscreen, mask and mechanical layers (free items; w line width, h text height)
Top Overlay:
  drawing of 76 lines, arcs and shapes, not listed
  text "48-17V Buck" at 1947,-1331 h50
  text "Rev 1" at 1948,-1374 h50
  text "Rayyan Mahmood" at 1947,-1429 h50
  text "06/09/2023" at 1946,-1470 h50